# Altium PCB PCB1.PcbDoc (part 1 of 2)
Units mm, origin at the board's own origin, x right, y up, seen from the top; angles counter-clockwise.
Board outline 22.86 x 46 mm, 4 copper layers (Top Layer (sig), Plane (gnd), Plane2 (gnd), Bottom Layer (sig)), stack 1.566 mm thick; 61 components, 57 nets, 283 pads, 148 vias.
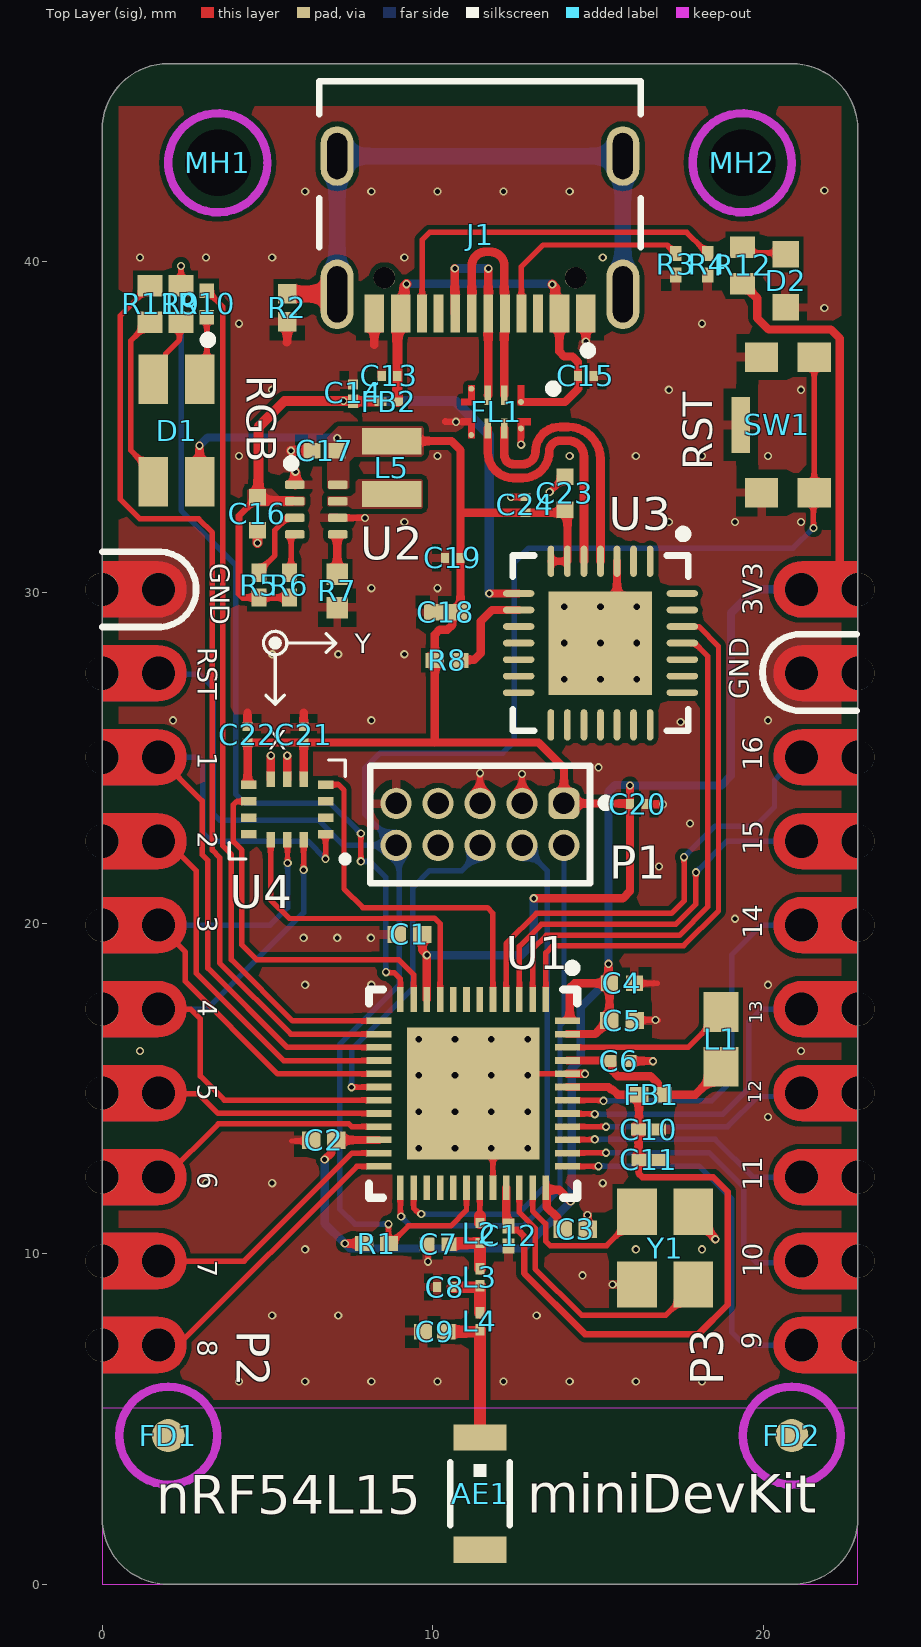
[diagram p0: Top Layer (sig) view]
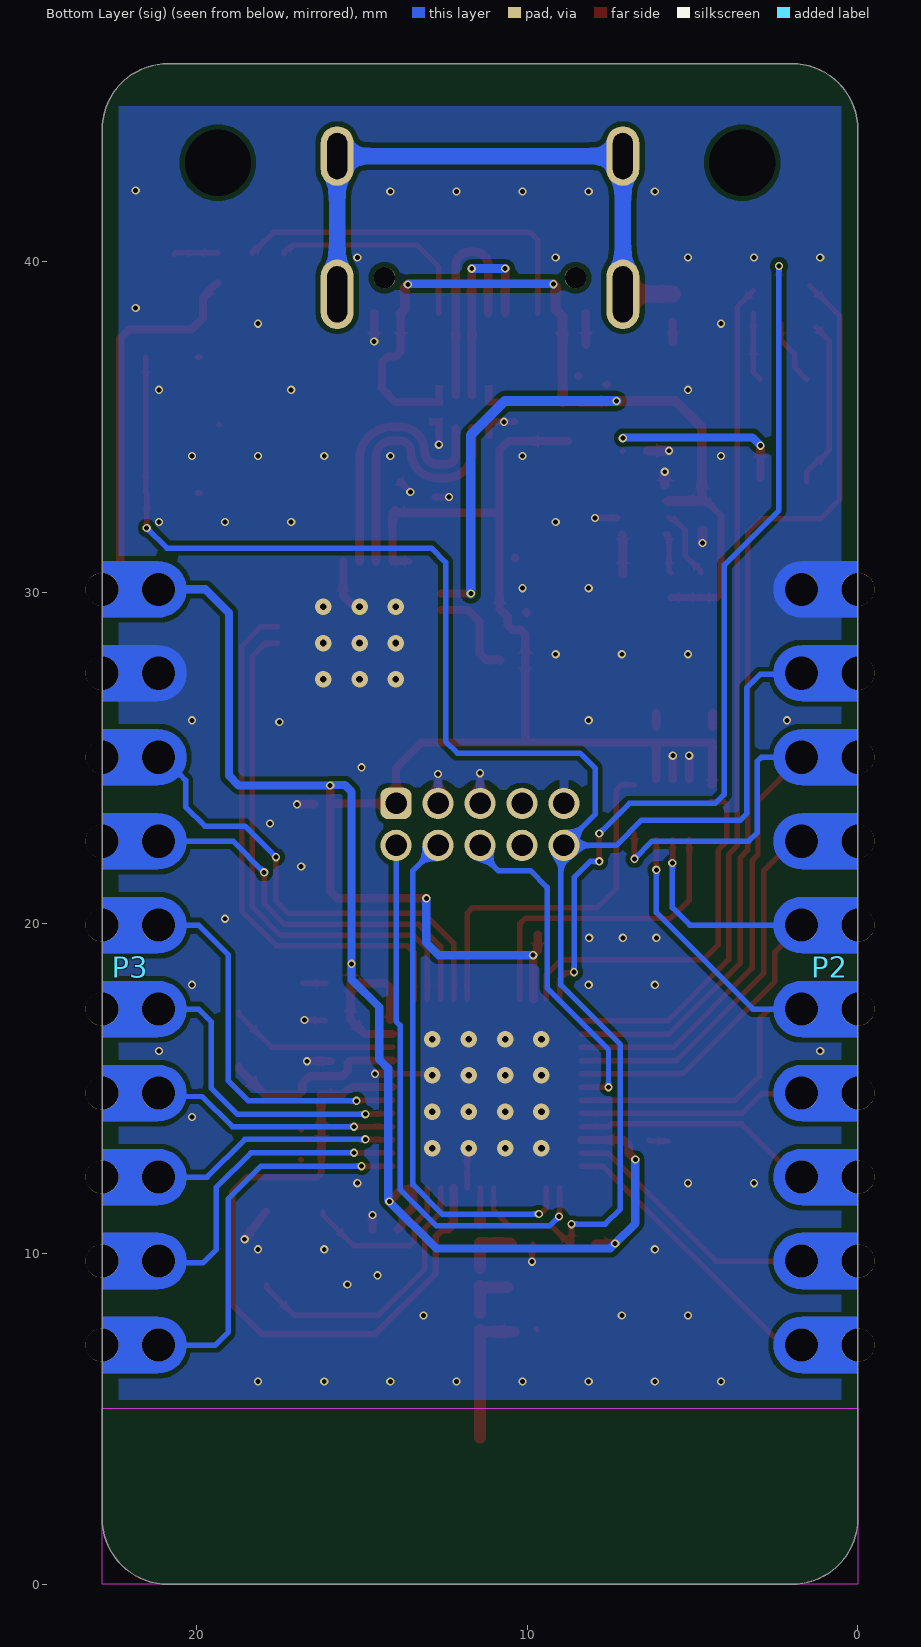
[diagram p1: Bottom Layer (sig) view, seen from below]
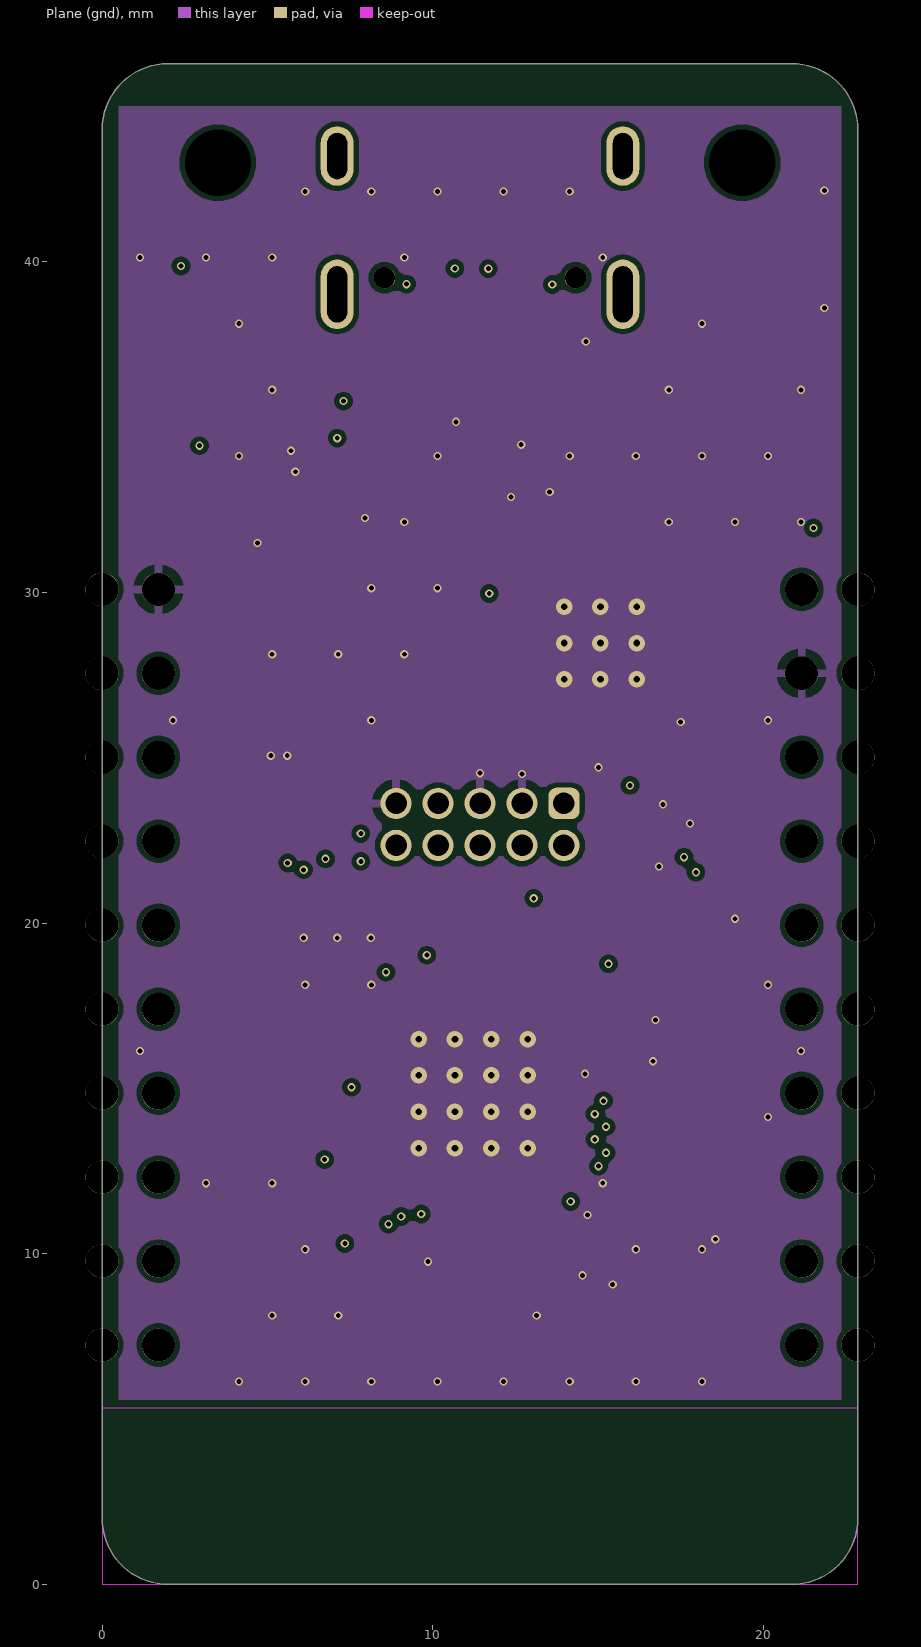
[diagram p2: Plane (gnd)]
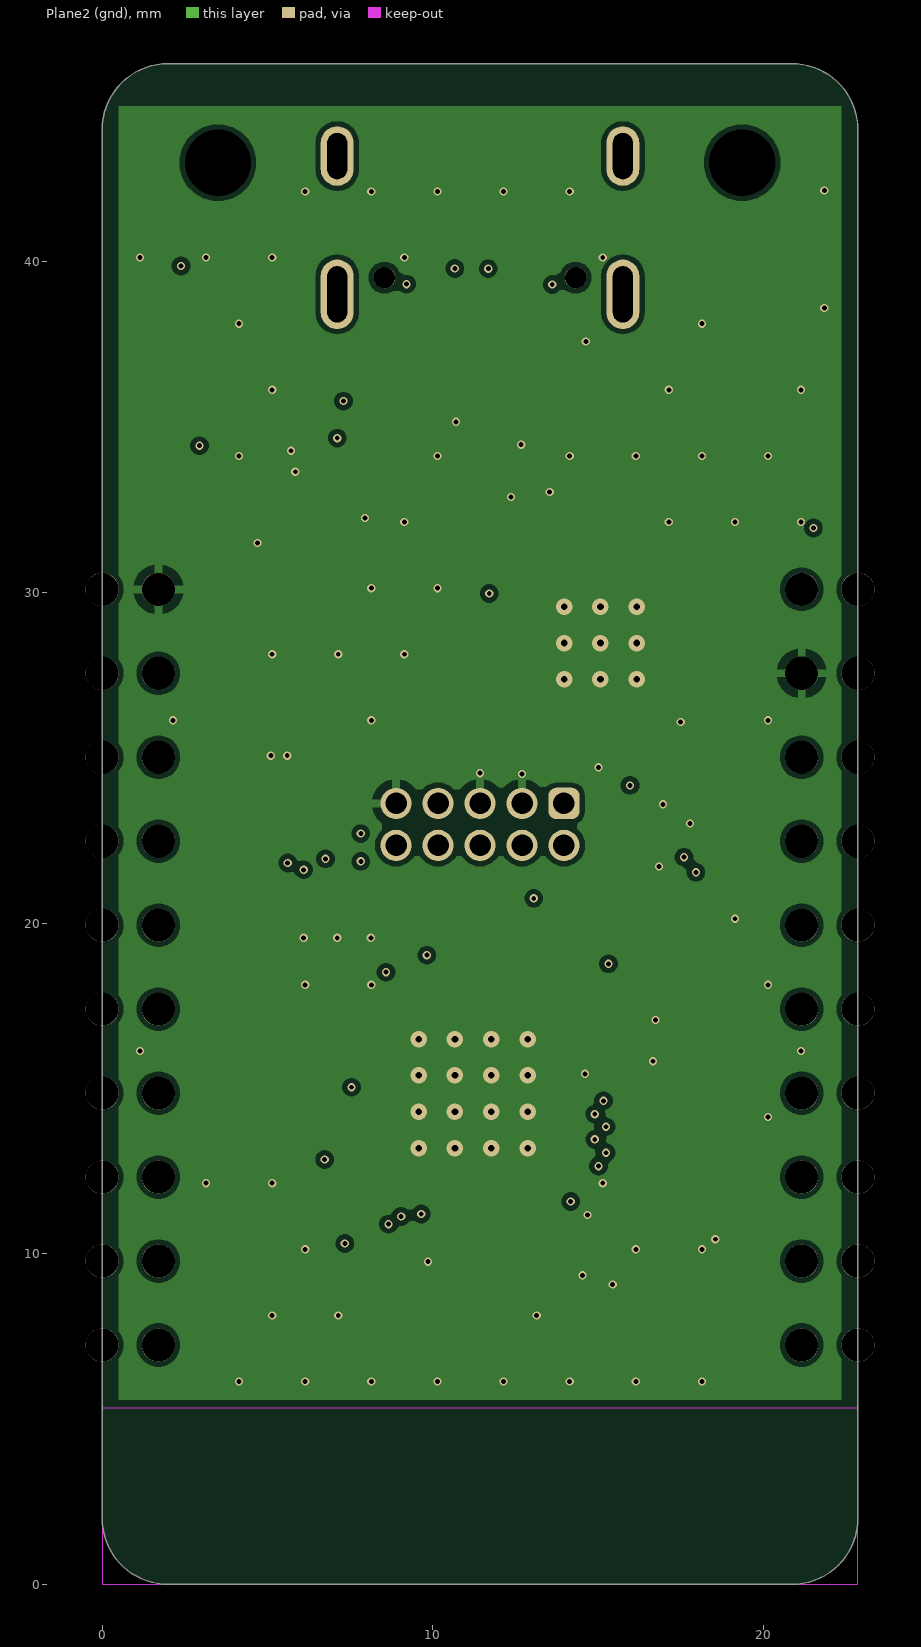
[diagram p3: Plane2 (gnd)]
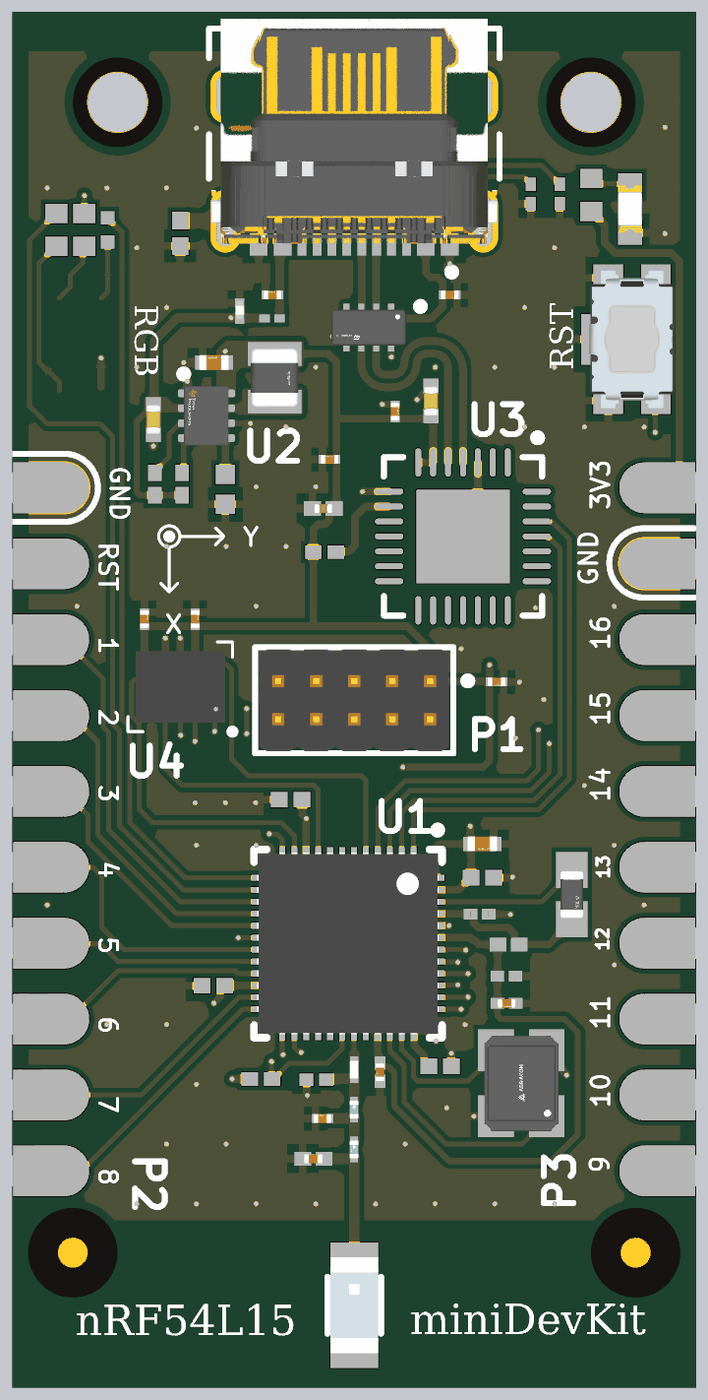
[diagram p5: 3D render of the assembled board from above, using the file's embedded part models]

## Layer stack, top to bottom
Top Solder: solder mask 0.0102, Solder Resist, Dk 3.5
Top Layer (sig): signal copper 0.035
Dielectric 2: prepreg 0.203, PP-006, Dk 4.4
Plane (gnd): signal copper 0.03
Dielectric 1: dielectric 1.03, FR-4, Dk 4.6
Plane2 (gnd): signal copper 0.03
Dielectric 3: prepreg 0.203, PP-006, Dk 4.4
Bottom Layer (sig): signal copper 0.035
Bottom Solder: solder mask 0.0102, Solder Resist, Dk 3.5

## Board outline
0,2 ccw(c2,2) 2,0 20.86,0 ccw(c20.86,2) 22.86,2 22.86,44 ccw(c20.86,44) 20.86,46 2,46 ccw(c2,44) 0,44

## Design rules (kind name [scope] priority, off if disabled: settings)
Clearance Clearance_2 [InComponent('P2','P3') vs InPolygon] p1: gap=0.152 ignorepadtopadclearanceinfootprint=TRUE
Clearance [All] p2: gap=0.15 ignorepadtopadclearanceinfootprint=FALSE
ComponentClearance [Not HasFootprint('Male_Headers_254_1x10') vs Not HasFootprint('Male_Headers_254_1x10')] p1: gap=0.254 collisioncheckmode=3 verticalgap=0.254 showdistances=FALSE
DiffPairsRouting [InDifferentialPairClass('All Differential Pairs')] p1: maxlimit=0.152 minlimit=0.152 mostfreqgap=0.152 toplayer_minwidth=0.265 toplayer_maxwidth=0.265 toplayer_prefwidth=0.265 bottomlayer_minwidth=0.265 bottomlayer_maxwidth=0.265 bottomlayer_prefwidth=0.265 impedanceprofiledriven=TRUE impedanceprofileid={C3FE540A-6831-4386-8260-1E42DD11D62C} impedanceprofilevalue=90.000000 maxuncoupledlength=12.7
HoleSize [All] p1: absolutevalues=TRUE maxlimit=6.3 minlimit=0.15 maxpercent=80.000 minpercent=20.000
HoleToHoleClearance [All] p1: gap=0.15 allowstackedmicrovias=TRUE
MinimumSolderMaskSliver [All] p1: minsoldermaskwidth=0.1
PlaneClearance [All] p1: clearance=0.254
PlaneConnect [All] p1: planeconnectstyle=Direct reliefexpansion=0.508 reliefentries=4 reliefconductorwidth=0.254 reliefairgap=0.254
PolygonConnect PolygonConnect_1 [InPadClass('Polygon_RC')] p1: thpad.connectstyle=Relief thpad.reliefconductorwidth=0.254 thpad.reliefentries=4 thpad.polygonreliefangle="90 Angle" thpad.airgapwidth=0.254 smdpad.connectstyle=Relief smdpad.reliefconductorwidth=0.254 smdpad.reliefentries=4 smdpad.polygonreliefangle="90 Angle" smdpad.airgapwidth=0.254 via.connectstyle=Direct via.reliefconductorwidth=0.254 via.reliefentries=4 via.polygonreliefangle="90 Angle" via.airgapwidth=0.254
PolygonConnect PolygonConnect_2 [(IsPad) AND (InPadClass('Polygon_DC'))] p2: thpad.connectstyle=Relief thpad.reliefconductorwidth=0.254 thpad.reliefentries=4 thpad.polygonreliefangle="90 Angle" thpad.airgapwidth=0.254 smdpad.connectstyle=Direct smdpad.reliefconductorwidth=0.254 smdpad.reliefentries=4 smdpad.polygonreliefangle="90 Angle" smdpad.airgapwidth=0.254 via.connectstyle=Direct via.reliefconductorwidth=0.254 via.reliefentries=4 via.polygonreliefangle="90 Angle" via.airgapwidth=0.254
PolygonConnect [All] p3: thpad.connectstyle=Relief thpad.reliefconductorwidth=0.254 thpad.reliefentries=4 thpad.polygonreliefangle="90 Angle" thpad.airgapwidth=0.254 smdpad.connectstyle=Relief smdpad.reliefconductorwidth=0.254 smdpad.reliefentries=4 smdpad.polygonreliefangle="90 Angle" smdpad.airgapwidth=0.254 via.connectstyle=Direct via.reliefconductorwidth=0.254 via.reliefentries=4 via.polygonreliefangle="90 Angle" via.airgapwidth=0.254
RoutingVias [All] p1: holewidth=0.2 width=0.3 viastyle="Through Hole" minholewidth=0.15 minwidth=0.25 maxholewidth=1 maxwidth=1.5
ShortCircuit [Not InComponent('P2','P3') vs Not InComponent('P2','P3')] p1: allowed=FALSE
SilkToSolderMaskClearance [IsPad] p1: minsilkscreentomaskgap=0.15 clearancetoexposedcopper=TRUE
SolderMaskExpansion [All] p1: expansion=0.038 istentingtop=FALSE
SupplyNets "Schematic Supply Nets_3" [InNet('VBUS')] p1: voltage=0.000
SupplyNets "Schematic Supply Nets_2" [InNet('V_USB')] p2: voltage=0.000
SupplyNets "Schematic Supply Nets_1" [InNet('GND')] p3: voltage=0.000
SupplyNets "Schematic Supply Nets" [InNet('3V3')] p4: voltage=0.000
Width RF_BLE [InNetClass('AntennaClass')] p1: maxlimit=0.355 minlimit=0.116 preferedwidth=0.355 toplayer_minwidth=0.355 bottomlayer_minwidth=0.355 impedanceprofiledriven=TRUE impedanceprofileid={DB60802E-1F74-4AC1-8945-EA78357C024C} impedanceprofilevalue=50.000000 minimp=50.000000 maximp=50.000000 favimp=50.000000
Width [All] p2: maxlimit=1 minlimit=0.165 preferedwidth=0.165
21 further rules are at their usual default settings.

## Classes and differential pairs
pad class Polygon_RC: P2- P2-1 P2-2 P2-3 P2-4 P2-5 P2-6 P2-7 P2-8 P2-9 P2-10 P3- P3-1 P3-2 P3-3 P3-4 P3-5 P3-6 P3-7 P3-8 P3-9 P3-10
pad class Polygon_DC: C16-1 C17-1 L5-1 L5-2 U2-2 U2-7 U2-8
polygon class "New Class": 3V3_L01_P007 NETL5_1_L01_P006 V_USB_L01_P008
component class Top-level: FD1 FD2 MH1 MH2
component class U_USB_UART_Bridge: C18 C19 C23 C24 R8 U3
component class U_Power: C16 C17 D2 L5 R5 R6 R7 R12 U2
component class U_MCU: AE1 C1 C2 C3 C4 C5 C6 C7 C8 C9 C10 C11 C12 D1 FB1 L1 L2 L3 L4 R1 R9 R10 R11 SW1 U1 Y1
component class U_IMU: C21 C22 U4
component class U_Connector: C13 C14 C15 C20 FB2 FL1 J1 P1 P2 P3 R2 R3 R4
differential pair USBD: +USBD_P -USBD_N
differential pair USB_D: +USB_D_P -USB_D_N

## Components (designator, comment, footprint, x,y, rotation, side; value= is the part's Value field where it differs from the comment)
AE1 "74889302450" 74889302450 11.43,2.743 r270 top locked
C1 "0.1uF" CAPC0603X33X15ML03T05 9.296,19.66 r0 top
C2 "0.1uF" CAPC0603X33X15ML03T05 6.707,13.437 r0 top
C3 "0.1uF" CAPC0603X33X15ML03T05 14.308,10.741 r180 top
C4 "10uF" FP-CL07-IPC_C 15.722,18.182 r0 top
C5 "0.1uF" CAPC0603X33X15ML03T05 15.726,17.053 r180 top
C6 "2.2uF" FP-CL03-IPC_B 15.632,15.828 r0 top
C7 "1.5pF" CAPC0603X33X15NL03T05 10.16,10.287 r0 top
C8 "2.0pF" FP-GRM033-0_03-MFG 10.363,8.992 r180 top
C9 "0.3pF" FP-GJM033-0_03-IPC_A 10.058,7.645 r180 top
C10 "2.2uF" FP-CL03-IPC_B 16.527,13.758 r0 top
C11 "10nF" FP-GRM033-0_03-IPC_B 16.537,12.841 r0 top
C12 "10nF" FP-GRM033-0_03-IPC_B 12.294,10.541 r270 top
C13 "0.10uF" FP-GRM033-0_03-MFG 8.692,36.553 r180 top
C14 "1uF" FP-CL03-IPC_C 7.594,36.042 r90 top
C15 "0.10uF" FP-GRM033-0_03-MFG 14.631,36.553 r0 top
C16 "4.7uF" FP-CC0402-MFG 4.699,32.385 r270 top value="4.7 uF"
C17 "10uF" FP-CL07-IPC_C 6.731,34.29 r180 top
C18 "1uF" FP-GRM033-0_09-IPC_A 10.393,29.406 r180 top
C19 "0.1uF" FP-GRM033-0_03-MFG 10.605,31.051 r180 top
C20 "0.10uF" FP-GRM033-0_03-MFG 16.201,23.602 r0 top
C21 "0.1uF" FP-GRM033-0_03-MFG 6.099,25.705 r90 top locked
C22 "0.1uF" FP-GRM033-0_03-MFG 4.402,25.705 r90 top locked
C23 "4.7UF" FP-CC0402-MFG 14,33 r90 top value="4.7 uF"
C24 "0.10uF" FP-GRM033-0_03-MFG 12.8,32.65 r90 top
D1 "150141M173100" WL-SFTW_3528_150141M173100 1272.249,-1235.1 r270 top
D2 "150060GS75000" WL-SMCW_0603_150060xx75000 20.673,39.431 r90 top
FB1 "BLM03AG121SN1D" FP-BLM03-0_03-d0_3-IPC_A 16.605,14.811 r180 top
FB2 "" FP-BLM03-0_03-d0_3-IPC_C 8.674,35.769 r180 top
FD1 "Fiducial 1mm" Fiducial_1mm 2,4.5 r0 top
FD2 "Fiducial 1mm" Fiducial_1mm 20.86,4.5 r0 top
FL1 "ECMF02-4CMX8" FP-Micro_QFN-8L-MFG 11.917,35.466 r270 top
J1 "USB4105-GF-A" FP-USB4105-GF-A-MFG 11.43,42.037 r180 top locked
L1 "4.7uH" FP-MLZ1608-IPC_A 18.72,16.485 r270 top
L2 "2.7nH" FP-LQP03HQ_02-MFG 11.428,10.625 r270 top
L3 "3.5nH" FP-LQP03TG_02-IPC_C 11.428,9.29 r270 top
L4 "3.5nH" FP-LQP03TG_02-IPC_C 11.428,7.958 r270 top
L5 "2.2uH" FP-DFE201612C-MFG 8.763,33.782 r90 top
MH1 "Mounting Hole M2" "Mounting Hole M2" 3.5,43 r0 top
MH2 "Mounting Hole M2" "Mounting Hole M2" 19.36,43 r0 top
P1 "62201021121" 62201021121 11.43,22.987 r180 top locked
P2 "1X10 2.54 male headers" Male_Headers_254_1x10 0.85,18.669 r90 bottom
P3 "1X10 2.54 male headers" Male_Headers_254_1x10 22.01,18.669 r270 bottom
R1 "1K" RESC0603X28X15ML05T05 8.305,10.311 r180 top
R2 "0" RESC1005X40X25NL05T10 5.598,38.616 r90 top
R3 "5.1K" RESC0603X26X15NL03T05 17.348,39.929 r90 top
R4 "5.1K" RESC0603X26X15NL03T05 18.315,39.934 r90 top
R5 "1K" RESC0603X28X15ML05T05 4.75,30.226 r90 top
R6 "1K" RESC0603X28X15ML05T05 5.664,30.226 r90 top
R7 "267K" RESC1005X40X25ML05T05 7.112,30.048 r90 top
R8 "1K" RESC0603X28X15ML05T05 10.438,27.95 r0 top
R9 "4R7" RESC0402(1005)_M 2.382,38.729 r90 top value="4.70 Ohm"
R10 "62R" RESC1005X40X25LL05T05 3.166,38.729 r90 top
R11 "4R7" RESC0402(1005)_M 1.45,38.729 r90 top value="4.70 Ohm"
R12 "4R7" RESC0402(1005)_M 19.369,39.898 r90 top value="4.70 Ohm"
SW1 "435431019840" 435431019840 20.739,35.07 r90 top
U1 "nRF54L15" nRF54L15_QFN8_6X6 11.222,14.845 r270 top locked
U2 "TPS62840DLCR" FP-DLC0008B-MFG 6.477,32.512 r0 top
U3 "CP2102-GMR" SLAB-QFN-28-3125x3125TP_M 15.074,28.473 r270 top
U4 "BMI323" BMI323 5.599,23.438 r180 top locked
Y1 "32MHz" FP-ABM8G-MFG 17.03,10.168 r90 top

## Footprints (in the part's own frame and the unit in brackets; to place one, negate y for a bottom-side part, rotate by r counter-clockwise, add the part's x,y. Pads: shape width x height; smd on the part's side, far side on the other; paste and mask are expansions set on the pad)
62201021121 [mm] "Pin Header, pitch 1.27 mm, THT, Vertical, dual row, 10p"
  rrect50% 0.95x0.95 hole 0.65: 1(-2.54,-0.635)
  round 0.95 hole 0.65: 2(-2.54,0.635) 3(-1.27,-0.635) 4(-1.27,0.635) 5(0,-0.635) 6(0,0.635) 7(1.27,-0.635) 8(1.27,0.635) 9(2.54,-0.635) 10(2.54,0.635)
  silkscreen extent -3.93,-1.78 3.32,1.78, body extent -3.17,-1.7 3.18,1.7, height 5.33
74889302450 [mm] "SMT-Multilayer Chip Antenna, body 3.2x1.6mm"
  rect 0.8x1.6 smd: 1(-1.7,0) 2(1.7,0)
  silkscreen extent -0.95,-0.9 0.95,0.9, body extent -1.6,-0.8 1.6,0.8, height 1.2
435431019840 [mm] "Tact Switch, SMT, body 4.1x2.8mm"
  rect 0.9x1 smd: A1(-2.05,0.8) A2(2.05,0.8) B1(-2.05,-0.8) B2(2.05,-0.8)
  rect 1.7x0.55 smd: G1(0,1.425)
  body extent -2.3,-1.4 2.3,1.45, height 1.9
BMI323 [mm]
  rect 0.475x0.25 smd: 1(-1.162,0.75) 2(-1.162,0.25) 3(-1.162,-0.25) 4(-1.162,-0.75) 8(1.162,-0.75) 9(1.162,-0.25) 10(1.162,0.25) 11(1.162,0.75)
  rect 0.25x0.475 smd: 5(-0.5,-0.913) 6(0,-0.913) 7(0.5,-0.913) 12(0.5,0.913) 13(0,0.913) 14(-0.5,0.913)
  silkscreen extent -1.85,-1.5 1.75,1.6, body extent -1.5,-1.19 1.5,1.19, height 0.87
CAPC0603X33X15ML03T05 [mm] "Chip Capacitor, 2-Leads, Body 0.60x0.30mm, IPC Low Density"
  rect 0.56x0.52 smd: 1(-0.38,0) 2(0.38,0)
  body extent -0.31,-0.17 0.32,0.16, height 0.33
CAPC0603X33X15NL03T05 [mm] "Chip Capacitor, 2-Leads, Body 0.60x0.30mm, IPC Medium Density"
  rect 0.46x0.42 smd: 1(-0.33,0) 2(0.33,0)
  body extent -0.31,-0.17 0.32,0.16, height 0.33
Fiducial_1mm [mm]
  round 1 smd paste-3 mask+1: 1(0,0)
  Top Layer (sig) keep-out circle w0.254: c0,0 r1.481
FP-ABM8G-MFG [mm]
  rect 1.4x1.2 smd paste+0 mask+0: 1(-1.1,-0.85) 2(1.1,-0.85) 3(1.1,0.85) 4(-1.1,0.85)
  body extent -1.9,-1.55 1.9,1.55, height 0.25
FP-BLM03-0_03-d0_3-IPC_A [mm]
  rect 0.554x0.463 smd paste+0 mask+0: 1(-0.354,0) 2(0.354,0)
FP-BLM03-0_03-d0_3-IPC_C [mm]
  rect 0.354x0.263 smd paste+0 mask+0: 1(-0.254,0) 2(0.254,0)
FP-CC0402-MFG [mm]
  rect 0.5x0.5 smd paste+0 mask+0: 1(-0.5,0) 2(0.5,0)
  body extent -0.87,-0.48 0.87,0.48, height 0.25
FP-CL03-IPC_B [mm]
  rect 0.454x0.363 smd paste+0 mask+0: 1(-0.304,0) 2(0.304,0)
  body extent -0.68,-0.33 0.68,0.33, height 0.25
FP-CL03-IPC_C [mm]
  rect 0.402x0.303 smd paste+0 mask+0: 1(-0.251,0)
  rect 0.3x0.303 smd paste+0 mask+0: 2(0.251,0)
  body extent -0.55,-0.3 0.55,0.3, height 0.25
FP-CL07-IPC_C [mm]
  rect 0.515x0.472 smd paste+0 mask+0: 1(-0.379,0) 2(0.379,0)
  body extent -0.74,-0.38 0.74,0.38, height 0.25
FP-DFE201612C-MFG [mm]
  rect 0.8x1.8 smd paste+0 mask+0: 1(-0.8,0) 2(0.8,0)
  body extent -1.3,-1 1.3,1, height 0.25
FP-DLC0008B-MFG [mm]
  rrect40% 0.6x0.25 smd paste+0 mask+0: 1(-0.65,0.75) 2(-0.65,0.25) 3(-0.65,-0.25) 4(-0.65,-0.75) 5(0.65,-0.75) 6(0.65,-0.25) 7(0.65,0.25) 8(0.65,0.75)
  silkscreen extent -0.89,1.27 -0.64,1.52, body extent -1.05,-1.15 1.05,1.15, height 0.25
FP-GJM033-0_03-IPC_A [mm]
  rect 0.554x0.463 smd paste+0 mask+0: 1(-0.354,0) 2(0.354,0)
  body extent -0.83,-0.43 0.83,0.43, height 0.25
FP-GRM033-0_03-IPC_B [mm]
  rect 0.454x0.363 smd paste+0 mask+0: 1(-0.304,0) 2(0.304,0)
  body extent -0.68,-0.33 0.68,0.33, height 0.25
FP-GRM033-0_03-MFG [mm]
  rect 0.25x0.3 smd paste+0 mask+0: 1(-0.238,0) 2(0.238,0)
  body extent -0.46,-0.27 0.46,0.27, height 0.25
FP-GRM033-0_09-IPC_A [mm]
  rect 0.577x0.503 smd paste+0 mask+0: 1(-0.363,0) 2(0.363,0)
  body extent -0.85,-0.45 0.85,0.45, height 0.25
FP-LQP03HQ_02-MFG [mm]
  rect 0.3x0.275 smd paste+0 mask+0: 1(-0.3,0) 2(0.3,0)
  body extent -0.55,-0.27 0.55,0.26, height 0.25
FP-LQP03TG_02-IPC_C [mm]
  rect 0.354x0.263 smd paste+0 mask+0: 1(-0.254,0) 2(0.254,0)
  body extent -0.53,-0.27 0.53,0.26, height 0.25
FP-Micro_QFN-8L-MFG [mm]
  round 0.18 smd paste+0 mask+0: 1(-0.3,0.75) 4(-0.7,-0.75) 5(0.7,-0.75) 8(0.5,0.75)
  rect 0.6x0.2 smd paste+0 mask+0: 2(-0.5,0.25) 3(-0.5,-0.25) 6(0.5,-0.25) 7(0.5,0.25)
  Top Layer (sig) region: 0.2,-1.05 0.4,-1.05 0.4,-0.85 0.8,-0.85 0.8,-0.65 0.2,-0.65
  Top Layer (sig) region: 0.2,1.05 0.4,1.05 0.4,0.85 0.8,0.85 0.8,0.65 0.2,0.65
  Top Layer (sig) region: -0.2,-1.05 -0.4,-1.05 -0.4,-0.85 -0.8,-0.85 -0.8,-0.65 -0.2,-0.65
  Top Layer (sig) region: -0.2,1.05 -0.4,1.05 -0.4,0.85 -0.8,0.85 -0.8,0.65 -0.2,0.65
  silkscreen extent -0.83,1.6 -0.58,1.85, body extent -0.9,-1.38 0.9,1.38, height 0.25
FP-MLZ1608-IPC_A [mm]
  rect 1.206x1.058 smd paste+0 mask+0: 1(-0.826,0) 2(0.826,0)
  body extent -1.93,-1.03 1.93,1.03, height 0.25
FP-USB4105-GF-A-MFG [mm]
  rrect100% 1x2.1 hole 1.7 slot 0.6 at 0 deg paste-2539.97 mask+0: 1(-4.32,3.015) 2(4.32,3.015)
  rrect100% 1x1.8 hole 1.4 slot 0.6 at 0 deg paste-2539.97 mask+0: 3(-4.32,-1.165) 4(4.32,-1.165)
  rect 0.6x1.15 smd paste+0 mask+0: A1-B12(-3.2,3.59) A4-B9(-2.4,3.59) B1-A12(3.2,3.59) B4-A9(2.4,3.59)
  rect 0.3x1.15 smd paste+0 mask+0: A5(-1.25,3.59) A6(-0.25,3.59) A7(0.25,3.59) A8(1.25,3.59) B5(1.75,3.59) B6(0.75,3.59) B7(-0.75,3.59) B8(-1.75,3.59)
  round 0.65 hole 0.65 unplated paste-2539.97 mask+0: ""(-2.89,2.515) ""(2.89,2.515)
  silkscreen extent -4.86,-3.43 4.86,4.84, body extent -4.96,-3.94 4.96,4.27, height 0.25
Male_Headers_254_1x10 [mm]
  round 1 hole 1: 1(-11.43,0.85) 2(-8.89,0.85) 3(-6.35,0.85) 4(-3.81,0.85) 5(-1.27,0.85) 6(1.27,0.85) 7(3.81,0.85) 8(6.35,0.85) 9(8.89,0.85) 10(11.43,0.85) ""(-11.43,-0.85) ""(-8.89,-0.85) ""(-6.35,-0.85) ""(-3.81,-0.85) ""(-1.27,-0.85) ""(1.27,-0.85) ""(3.81,-0.85) ""(6.35,-0.85) ""(8.89,-0.85) ""(11.43,-0.85)
  Top Layer (sig) region: -12.28,-0.85 -10.58,-0.85 -10.58,0.85 -10.664,1.219 -10.9,1.515 -11.241,1.679 -11.619,1.679 -11.96,1.515 -12.196,1.219 -12.28,0.85 -12.28,0.85
  Top Layer (sig) region: -9.74,-0.85 -8.04,-0.85 -8.04,0.85 -8.124,1.219 -8.36,1.515 -8.701,1.679 -9.079,1.679 -9.42,1.515 -9.656,1.219 -9.74,0.85 -9.74,0.85
  Top Layer (sig) region: -7.2,-0.85 -5.5,-0.85 -5.5,0.85 -5.584,1.219 -5.82,1.515 -6.161,1.679 -6.539,1.679 -6.88,1.515 -7.116,1.219 -7.2,0.85 -7.2,0.85
  Top Layer (sig) region: -4.66,-0.85 -2.96,-0.85 -2.96,0.85 -3.044,1.219 -3.28,1.515 -3.621,1.679 -3.999,1.679 -4.34,1.515 -4.576,1.219 -4.66,0.85 -4.66,0.85
  Top Layer (sig) region: -2.12,-0.85 -0.42,-0.85 -0.42,0.85 -0.504,1.219 -0.74,1.515 -1.081,1.679 -1.459,1.679 -1.8,1.515 -2.036,1.219 -2.12,0.85 -2.12,0.85
  Top Layer (sig) region: 0.42,-0.85 2.12,-0.85 2.12,0.85 2.036,1.219 1.8,1.515 1.459,1.679 1.081,1.679 0.74,1.515 0.504,1.219 0.42,0.85 0.42,0.85
  Top Layer (sig) region: 2.96,-0.85 4.66,-0.85 4.66,0.85 4.576,1.219 4.34,1.515 3.999,1.679 3.621,1.679 3.28,1.515 3.044,1.219 2.96,0.85 2.96,0.85
  Top Layer (sig) region: 5.5,-0.85 7.2,-0.85 7.2,0.85 7.116,1.219 6.88,1.515 6.539,1.679 6.161,1.679 5.82,1.515 5.584,1.219 5.5,0.85 5.5,0.85
  Top Layer (sig) region: 8.04,-0.85 9.74,-0.85 9.74,0.85 9.656,1.219 9.42,1.515 9.079,1.679 8.701,1.679 8.36,1.515 8.124,1.219 8.04,0.85 8.04,0.85
  Top Layer (sig) region: 10.58,-0.85 12.28,-0.85 12.28,0.85 12.196,1.219 11.96,1.515 11.619,1.679 11.241,1.679 10.9,1.515 10.664,1.219 10.58,0.85 10.58,0.85
  Bottom Layer (sig) region: 0.42,-0.85 2.12,-0.85 2.12,0.85 2.036,1.219 1.8,1.515 1.459,1.679 1.081,1.679 0.74,1.515 0.504,1.219 0.42,0.85 0.42,0.85
  Bottom Layer (sig) region: 10.58,-0.85 12.28,-0.85 12.28,0.85 12.196,1.219 11.96,1.515 11.619,1.679 11.241,1.679 10.9,1.515 10.664,1.219 10.58,0.85 10.58,0.85
  Bottom Layer (sig) region: 8.04,-0.85 9.74,-0.85 9.74,0.85 9.656,1.219 9.42,1.515 9.079,1.679 8.701,1.679 8.36,1.515 8.124,1.219 8.04,0.85 8.04,0.85
  Bottom Layer (sig) region: 5.5,-0.85 7.2,-0.85 7.2,0.85 7.116,1.219 6.88,1.515 6.539,1.679 6.161,1.679 5.82,1.515 5.584,1.219 5.5,0.85 5.5,0.85
  Bottom Layer (sig) region: 2.96,-0.85 4.66,-0.85 4.66,0.85 4.576,1.219 4.34,1.515 3.999,1.679 3.621,1.679 3.28,1.515 3.044,1.219 2.96,0.85 2.96,0.85
  Bottom Layer (sig) region: -4.66,-0.85 -2.96,-0.85 -2.96,0.85 -3.044,1.219 -3.28,1.515 -3.621,1.679 -3.999,1.679 -4.34,1.515 -4.576,1.219 -4.66,0.85 -4.66,0.85
  Bottom Layer (sig) region: -2.12,-0.85 -0.42,-0.85 -0.42,0.85 -0.504,1.219 -0.74,1.515 -1.081,1.679 -1.459,1.679 -1.8,1.515 -2.036,1.219 -2.12,0.85 -2.12,0.85
  Bottom Layer (sig) region: -7.2,-0.85 -5.5,-0.85 -5.5,0.85 -5.584,1.219 -5.82,1.515 -6.161,1.679 -6.539,1.679 -6.88,1.515 -7.116,1.219 -7.2,0.85 -7.2,0.85
  Bottom Layer (sig) region: -9.74,-0.85 -8.04,-0.85 -8.04,0.85 -8.124,1.219 -8.36,1.515 -8.701,1.679 -9.079,1.679 -9.42,1.515 -9.656,1.219 -9.74,0.85 -9.74,0.85
  Bottom Layer (sig) region: -12.28,-0.85 -10.58,-0.85 -10.58,0.85 -10.664,1.219 -10.9,1.515 -11.241,1.679 -11.619,1.679 -11.96,1.515 -12.196,1.219 -12.28,0.85 -12.28,0.85
"Mounting Hole M2" [mm]
  round 0 hole 2 mask+1.5: 3(0,0)
  Top Layer (sig) keep-out circle w0.254: c0,0 r1.5
nRF54L15_QFN8_6X6 [mm] "nRF54L15_QFN8_6X6, 48-Leads, Body 6,00x6,00mm, Pitch 0,40mm, Thermal Pad 4,60x4,60mm, IPC High Density"
  rect 0.75x0.2 smd: 1(-2.85,2.2) 2(-2.85,1.8) 3(-2.85,1.4) 4(-2.85,1) 5(-2.85,0.6) 6(-2.85,0.2) 7(-2.85,-0.2) 8(-2.85,-0.6) 9(-2.85,-1) 10(-2.85,-1.4) 11(-2.85,-1.8) 12(-2.85,-2.2) 25(2.85,-2.2) 26(2.85,-1.8) 27(2.85,-1.4) 28(2.85,-1) 29(2.85,-0.6) 30(2.85,-0.2) 31(2.85,0.2) 32(2.85,0.6) 33(2.85,1) 34(2.85,1.4) 35(2.85,1.8) 36(2.85,2.2)
  rect 0.2x0.75 smd: 13(-2.2,-2.85) 14(-1.8,-2.85) 15(-1.4,-2.85) 16(-1,-2.85) 17(-0.6,-2.85) 18(-0.2,-2.85) 19(0.2,-2.85) 20(0.6,-2.85) 21(1,-2.85) 22(1.4,-2.85) 23(1.8,-2.85) 24(2.2,-2.85) 37(2.2,2.85) 38(1.8,2.85) 39(1.4,2.85) 40(1,2.85) 41(0.6,2.85) 42(0.2,2.85) 43(-0.2,2.85) 44(-0.6,2.85) 45(-1,2.85) 46(-1.4,2.85) 47(-1.8,2.85) 48(-2.2,2.85)
  rect 4x4 smd: 49(0,0)
  silkscreen extent -3.92,-3.15 3.15,3.15, body extent -3.04,-3.04 3.04,3.04, height 0.9
RESC0402(1005)_M [mm] "Chip Resistor, Body 1.0x0.5mm, IPC Low Density"
  rect 0.65x0.75 smd: 1(-0.55,0) 2(0.55,0)
  body extent -0.52,-0.28 0.53,0.28, height 0.4
RESC0603X26X15NL03T05 [mm] "Chip Resistor, 2-Leads, Body 0.60x0.30mm, IPC Medium Density"
  rect 0.45x0.35 smd: 1(-0.325,0) 2(0.325,0)
  body extent -0.32,-0.16 0.32,0.17, height 0.26
RESC0603X28X15ML05T05 [mm] "Chip Resistor, 2-Leads, Body 0.60x0.30mm, IPC Low Density"
  rect 0.55x0.45 smd: 1(-0.375,0) 2(0.375,0)
  body extent -0.33,-0.17 0.33,0.18, height 0.28
RESC1005X40X25LL05T05 [mm] "Chip Resistor, 2-Leads, Body 1.00x0.50mm, IPC High Density"
  rect 0.45x0.45 smd: 1(-0.4,0) 2(0.4,0)
  body extent -0.53,-0.27 0.53,0.28, height 0.4
RESC1005X40X25ML05T05 [mm] "Chip Resistor, 2-Leads, Body 1.00x0.50mm, IPC Low Density"
  rect 0.65x0.65 smd: 1(-0.5,0) 2(0.5,0)
  body extent -0.53,-0.27 0.53,0.28, height 0.4
RESC1005X40X25NL05T10 [mm] "Chip Resistor, 2-Leads, Body 1.00x0.50mm, IPC Medium Density"
  rect 0.6x0.55 smd: 1(-0.425,0) 2(0.425,0)
  body extent -0.53,-0.27 0.53,0.28, height 0.4
SLAB-QFN-28-3125x3125TP_M [mm] "QFN, 28-Leads, Body 5x5mm, Pitch 0.5mm, Thermal Pad 3.13x3.13mm, IPC Low Density"
  oval 0.95x0.2 smd: 1(-2.475,1.5) 2(-2.475,1) 3(-2.475,0.5) 4(-2.475,0) 5(-2.475,-0.5) 6(-2.475,-1) 7(-2.475,-1.5) 15(2.475,-1.5) 16(2.475,-1) 17(2.475,-0.5) 18(2.475,0) 19(2.475,0.5) 20(2.475,1) 21(2.475,1.5)
  oval 0.2x0.95 smd: 8(-1.5,-2.475) 9(-1,-2.475) 10(-0.5,-2.475) 11(0,-2.475) 12(0.5,-2.475) 13(1,-2.475) 14(1.5,-2.475) 22(1.5,2.475) 23(1,2.475) 24(0.5,2.475) 25(0,2.475) 26(-0.5,2.475) 27(-1,2.475) 28(-1.5,2.475)
  rect 3.13x3.13 smd: 29(0,0)
  silkscreen extent -3.42,-2.65 2.65,2.65, body extent -2.5,-2.5 2.5,2.5, height 1
WL-SFTW_3528_150141M173100 [mm] "SMT Full-color TOP LED Waterclear, body 3.5x2.8mm"
  rect 1.5x0.9 smd: 1(-1268.45,-1269.3) 2(-1268.45,-1270.7) 3(-1271.55,-1269.3) 4(-1271.55,-1270.7)
  silkscreen extent -1272.87,-1269.17 -1272.62,-1268.92, body extent -1271.75,-1271.4 -1268.25,-1268.6, height 1.9
WL-SMCW_0603_150060xx75000 [mm] "SMD Mono-color Chip LED, body 1.60 x 0.80 mm"
  rect 0.8x0.8 smd: 1(-0.8,0) 2(0.8,0)
  body extent -0.8,-0.4 0.8,0.4, height 0.7

## Part data
AE1: library part CMP-03913-126098687-1, "74889302450 Chip Antenna, 2.45Ghz, 3.2Mm X 1.6Mm X 1.2Mm Rohs Compliant: Yes", Current Rating=2A, Max Operating Temperature=85°C, Min Operating Temperature=-40°C, Height=1.2mm, Impedance=50Ω, Length=3.2mm, NexarPartId=126098687, RoHS=Compliant, Width=1.6mm
C1 C2 C3 C5: library part CMP-2010-00674-1, Manufacturer=Samsung, Part Number=CL03A104KQ3NNNC
C4 C17: library part CMP-13271-002778-1, "Cap Ceramic 10uF 10V X5R ±20% SMD 0402 +85°C Paper T/R", Case Code (Imperial)=0402, Case Code (Metric)=1005, Max Operating Temperature=85°C, Min Operating Temperature=-55°C, Tolerance=20%, Voltage Rating=10V, Capacitance=10uF, Case/Package=0402, Length=0.039inch, Mount="Surface Mount", Packaging="Tape and Reel", Thickness=0.035inch, Width=0.02inch
C6 C10: library part CMP-13271-002263-1, "Cap Ceramic 2.2uF 10V X5R ±20% Pad SMD 0201 +85°C T/R", Case Code (Imperial)=0201, Case Code (Metric)=0603, Max Operating Temperature=85°C, Min Operating Temperature=-55°C, Tolerance=20%, Voltage Rating=10V, Capacitance=2.2uF, Case/Package=0201, Lead Free="Lead Free", Length=0.024inch, Mount="Surface Mount", Packaging="Tape and Reel", Thickness=0.013inch, Width=0.012inch
C7: library part CMP-1033-00061-2, Manufacturer="AVX Interconnect / Elco", Part Number=02013A1R5CAT2A
C8: library part CMP-2010-01348-2, "Chip Multilayer Ceramic Capacitors for General Purpose, 0201, 2.0pF, C0G, 30ppm/°C, 0.25pF, 25V", Capacitance=2pF, Case Code (Imperial)=0201, Case Code (Metric)=0603, Dielectric=C0G, Max Operating Temperature=125°C, Min Operating Temperature=-55°C, Package Quantity=15000, Voltage Rating=25V, Case/Package=0201, Height=0.3mm, Lead Free="Lead Free", Length=0.024inch, Mount="Surface Mount", Packaging="Tape and Reel", REACH SVHC="No SVHC", Termination=SMD/SMT, Thickness=0.013inch, Voltage Rating (DC)=25V, Width=0.012inch
C9: library part CMP-2010-00788-2, "Ceramic Capacitor 0.3pF ±0.05pF 25V C0G 0201 (0603 Metric)", Case Code (Imperial)=0201, Case Code (Metric)=0603, Dielectric=C0G, Max Operating Temperature=125°C, Min Operating Temperature=-55°C, Package Quantity=15000, Voltage Rating=25V, Capacitance=0.3pF, Case/Package=0201, Depth=0.3mm, Height=0.3mm, Lead Free="Lead Free", Length=0.6mm, Mount="Surface Mount", Packaging="Tape and Reel", Radiation Hardening=No, Termination=SMD/SMT, Thickness=0.013inch, Voltage Rating (DC)=25V, Width=0.3mm
C11 C12: library part CMP-2010-01684-2, "Chip Multilayer Ceramic Capacitors for General Purpose, 0201, 10000pF, X7R, 15%, 10%, 10V", Case Code (Imperial)=0201, Case Code (Metric)=0603, Dielectric=X7R, Max Operating Temperature=125°C, Min Operating Temperature=-55°C, Package Quantity=1, Tolerance=10%, Voltage=10V, Capacitance=10nF, Case/Package=0201, Depth=0.3mm, Height=0.3mm, Lead Free="Lead Free", Length=0.6mm, Material=Ceramic, Mount="Surface Mount", Packaging="Tape and Reel", Radiation Hardening=No, REACH SVHC="No SVHC", Termination=SMD/SMT, Thickness=0.013inch, Voltage Rating=10V, Voltage Rating (DC)=10V, Width=0.012inch
C13 C15 C19 C20 C21 C22 C24: library part CMP-06035-019037-1, "Chip Multilayer Ceramic Capacitors for General Purpose, 0201, 0.10uF, X7S, 22%, 10%, 16V", Capacitance=100nF, Case Code (Imperial)=0201, Case Code (Metric)=0603, Dielectric=X7S, Max Operating Temperature=125°C, Min Operating Temperature=-55°C, Package Quantity=15000, Tolerance=10%, Voltage Rating=16V, Case/Package=0201, Height=0.3mm, Length=0.024inch, Mount="Surface Mount", Packaging="Tape and Reel", Termination=SMD/SMT, Thickness=0.013inch, Voltage Rating (DC)=16V, Weight=1.2E-05oz, Width=0.3mm
C14: library part CMP-13271-000008-1, "CAP CER 1UF 16V X5R 0201", Manufacturer="Samsung Electro-Mechanics", Manufacturer Part Number=CL03A105MO3NRNH, Package=CL03, Temperature="-55°C to +85°C", Temperature Characteristic=X5R, Temperature Coefficient=15%, Temperature Range High=+85°C, Temperature Range Low=-55°C, Tolerance=20%, Voltage Rating=16V, Automotive=No, Capacitance=1uF, Category=Cap, ComponentLink2Description=Datasheet, ComponentLink2URL=http://www.samsungsem.com/global/front/downloadcms.do?path=%2F%2Fglobal%2F%2Fsupport%2F%2Fproduct-search%2F%2Fmlcc%2F%2F__icsFiles%2F%2Fafieldfile%2F%2F2018%2F%2F06%2F%2F21&fileName=CL03A105MO3NRNH.pdf, Device Class L1="Passive Components", Device Class L2=Capacitors, Device Class L3="Ceramic Capacitors", Digikey Description="CAP CER 1UF 16V X5R 0201", Height=0.39mm, Ipc Land Pattern Name=CAPC6030X30, Lead Free=Yes, Material=Ceramic, Octopart=https://octopart.com/cl03a105mo3nrnh-samsung-47681184, RoHS=TRUE
C16 C23: library part CMP-03422-000819-1, "CAP CER 4.7UF 16V X5R 0402", Capacitance="4.7 uF", Manufacturer=YAGEO, Manufacturer Part Number=CC0402MRX5R7BB475, Package=CC0402, Temperature="-55°C to +125°C", Temperature Characteristic=X5R, Temperature Coefficient=30ppm/°C, Temperature Range High=+125°C, Temperature Range Low=-55°C, Tolerance=0.2, Voltage Rating="16 V", Automotive=No, Automotive Grade=NA, Category=Cap, ComponentLink2Description=Datasheet, ComponentLink2URL=http://www.yageo.com/documents/recent/UPY-GP_NP0_16V-to-50V_16.pdf, Device Class L1="Passive Components", Device Class L2=Capacitors, Device Class L3="Ceramic Capacitors", Digikey Description="CAP CER 4.7UF 16V X5R 0402", Footprint Url=http://www.yageo.com/exep/pages/download/literatures/UPY-C_GEN_24.pdf, Height=0.55mm, Ipc Land Pattern Name=CAPC10050X50, Lead Free=Yes, Material=Ceramic, Mouser Description="Multilayer Ceramic Capacitors MLCC - SMD/SMT 4.7uF 16V 20% Ceramic Capacitor", Octopart=https://octopart.com/cc0402mrx5r7bb475-yageo-81932628, RoHS=TRUE
C18: library part CMP-06035-002798-1, "Chip Multilayer Ceramic Capacitors for General Purpose, 0201, 1.0uF, X5R, 15%, 20%, 10V", Case Code (Imperial)=0201, Case Code (Metric)=0603, Dielectric=X5R, Max Operating Temperature=85°C, Min Operating Temperature=-55°C, Tolerance=20%, Voltage Rating=10V, Capacitance=1uF, Case/Package=0201, Length=0.024inch, Mount="Surface Mount", Packaging="Tape and Reel", Thickness=0.015inch, Voltage Rating (DC)=10V, Width=0.012inch
D1: library part CMP-1431-00001-2, Case Code (Imperial)=1411, Case Code (Metric)=3528, Color="Green, Red", Forward Current=100mA, Forward Voltage=3.2V, Max Operating Temperature=85°C, Max Reverse Voltage (DC)=5V, Min Operating Temperature=-40°C, Power Dissipation=72mW, Test Current=20mA, Case/Package=1411, Dominant Wavelength=520nm, Height=1.9mm, Length=3.5mm, Lens Style="Clear, Round", Luminous Intensity=230mcd, Mount="Surface Mount", NexarPartId=29717795, Number of Pins=4, Packaging="Tape and Reel", Peak Wavelength=465nm, REACH SVHC=Unknown, RoHS=Compliant, Viewing Angle=120°, Wavelength=470nm, Width=2.8mm
D2: library part CMP-1426-00002-4, "430mcd Colorless transparence 520nm Emerald 140° LED0603 Light Emitting Diodes (LED) ROHS", Case Code (Imperial)=0603, Case Code (Metric)=1608, Color=Green, Forward Current=100mA, Forward Voltage=3.2V, Max Junction Temperature (Tj)=95°C, Max Operating Temperature=85°C, Max Reverse Voltage (DC)=5V, Min Operating Temperature=-40°C, Output Current=10µA, Power Dissipation=105mW, Test Current=20mA, Case/Package=0603, Dominant Wavelength=525nm, Height=700µm, Lead Free="Lead Free", Length=1.6mm, Lens Style="Clear, Rectangular", Luminous Intensity=430mcd, Mount="Surface Mount", Packaging="Tape and Reel", Peak Wavelength=515nm, REACH SVHC=Unknown, Reverse Voltage=5V, RoHS=Compliant, Viewing Angle=140°, Wavelength=525nm, Width=800µm
FB1: library part CMP-0686-00046-3, "Ferrite Bead, 0201, 120Ω @ 100MHz, 25%, 0.5Ω, 200mA", Case Code (Imperial)=0201, Case Code (Metric)=0603, Current Rating=200mA, DC Resistance (DCR)=500mR, Frequency=100MHz, Max Operating Temperature=125°C, Min Operating Temperature=-55°C, Package Quantity=1, Tolerance=25%, Case/Package=0201, Core Material=Ferrite, DC Resistance-Max=500mR, Depth=0.33mm, Height=0.3mm, Impedance=120R, Lead Free="Lead Free", Length=0.6mm, Material=Steel, Max Current Rating=200mA, Max DC Current=200mA, Number of Circuits=1, Number of Lines=1, Number of Pins=2, Packaging="Tape and Reel", REACH SVHC="No SVHC", RoHS Compliant=Yes, Series=BLM03AG, Shielding=Unshielded, Termination=SMD/SMT, Test Frequency=100MHz, Width=0.3mm
FB2: library part CMP-06046-002105-1, "BLM03EB500SH1D, Ferrite Bead, 0201, 50Ω @ 100MHz, 25%, 0.58Ω, 400mA", RoHS Compliant=Yes
FL1: library part CMP-12075-000002-1, "COMMON MODE CHOKE 2LN SMD ESD", Case/Package=QFN, DC Resistance (DCR)=4R, Max Operating Temperature=85°C, Min Operating Temperature=-30°C, Package Quantity=3000, Depth=1.25mm, Height=0.022inch, Lead Free="Lead Free", Length=0.098inch, Mount="Surface Mount", Number of Lines=2, Number of Pins=8, Packaging="Tape and Reel", REACH SVHC="No SVHC", Termination=Flat, Width=0.047inch
J1: library part CMP-245163-000001-1, "CONN RCPT USB2.0 TYPEC 5A", Current Rating=5/6.25/1.25/0.25A, Manufacturer=GCT, Package=0, Temperature="-40°C to +85°C", Temperature Range High=+85°C, Temperature Range Low=-40°C, Voltage Rating=20V, Automotive=No, Category=Conn, ComponentLink2Description=Datasheet, ComponentLink2URL=https://gct.co/files/drawings/usb4105.pdf, Conn Orientation="Right Angle", Contact Material=Gold,Nickel, Device Class L1=Connectors, Device Class L2="USB Connectors", Device Class L3=unset, Digikey Description="CONN RCPT USB2.0 TYPEC 5A", Height=3.46mm, Is Female=yes, Lead Free=Yes, Manufacturer Part Number=USB4105-GF-A, Number of Contacts=16, Octopart=https://octopart.com/usb4105-gf-a-gct-106627878, RoHS=TRUE, USB Standard="USB 2.0"
L1: library part CMP-08253-000311-1, "Shielded Multilayer Inductor 4.7uH ±20% 350mA 650mΩ SMD 0603", Case Code (Imperial)=0603, Case Code (Metric)=1608, Current Rating=350mA, DC Resistance (DCR)=650mR, Max Operating Temperature=125°C, Min Operating Temperature=-55°C, Package Quantity=4000, Saturation Current=120mA, Self Resonant Frequency=80MHz, Test Frequency=2MHz, Tolerance=20%, Case/Package=0603, Core Material=Ferrite, Height - Seated (Max)=0.037inch, Inductance=4.7uH, Length=0.063inch, Mount="Surface Mount", Packaging="Tape and Reel", RoHS Compliant=Yes, Shielding=Shielded, Width=0.031inch
L2: library part CMP-06042-004733-1, "Film type RF Inductor 2.7nH ±0.1nH 600mA 0.12Ω 0201 (0603)", Case Code (Imperial)=0201, Case Code (Metric)=0603, Current Rating=600mA, DC Resistance (DCR)=120mR, Max Operating Temperature=125°C, Min Operating Temperature=-55°C, Resistor Type="Thin Film", Self Resonant Frequency=9GHz, Test Frequency=500MHz, Case/Package=0201, Core Material=Non-Magnetic, Inductance=2.7nH, Mount="Surface Mount", Packaging="Tape and Reel", Shielding=Unshielded
L3 L4: library part CMP-06042-011870-1, "Film type RF Inductor 3.5nH ±0.1nH 450mA 0.25Ω 0201 (0603)", Case Code (Imperial)=0201, Case Code (Metric)=0603, Current Rating=450mA, DC Resistance (DCR)=250mR, Max Operating Temperature=125°C, Min Operating Temperature=-55°C, Package Quantity=15000, Resistor Type="Thin Film", Self Resonant Frequency=7GHz, Test Frequency=500MHz, Case/Package=0201, Core Material=Non-Magnetic, Height=0.3mm, Height - Seated (Max)=0.013inch, Inductance=3.5nH, Lead Free="Lead Free", Length=0.024inch, Max DC Current=450mA, Mount="Surface Mount", Packaging="Tape and Reel", Q Factor=14, Shielding=Unshielded, Termination=SMD/SMT, Width=0.012inch
L5: library part CMP-06042-009962-1, "Shielded Wirewound Inductor 2.2uH 20% 1800mA 0.116Ω 0806 (2016)"
P1: library part CMP-1502-00948-3, Color=Black, Contact Resistance=20mΩ, Current Rating=1A, Max Operating Temperature=105°C, Min Operating Temperature=-40°C, Operating Supply Voltage=100V, Connector Type="Male Pin", Contact Material=Copper, Contact Mating Length=3.81mm, Contact Plating=Gold, Gender=Male, Height=5.65mm, Lead Pitch=1.27mm, Mount="Through Hole", NexarPartId=32855586, Number of Contacts=10, Number of Pins=10, Number of Positions=10, Number of Rows=2, Orientation=Vertical, Packaging=Box, Pitch=1.27mm, REACH SVHC=Unknown, RoHS=Compliant, Row Spacing=1.27mm, Termination=Solder, Voltage Rating=100V
P2 P3: library part Male_Headers_254_1x10
R1 R5 R6 R8: library part CMP-2004-00209-1, Manufacturer="Vishay Dale", Part Number=CRCW02011K00FNED
R2: library part CMP-1011-00001-2, Manufacturer="Yageo / Phycomp", Part Number=RC0402JR-070RL
R3 R4: library part CMP-2004-02525-1, Manufacturer=Multicomp, Part Number=MCRE000157
R7: library part CMP-2002-00823-1, Manufacturer=Panasonic, Part Number=ERJ-2RKF2673X
R9 R11 R12: library part CMP-1011-00018-1, "4R7 0.063W 5% 0402 (1005 Metric)  SMD", Case-EIA=0402, Case-Metric=1005, Power="0.063 W", Tolerance="5 %", Technology=SMT
R10: library part CMP-2002-00152-1, Manufacturer="Vishay Dale", Part Number=CRCW040262R0JNED
SW1: library part CMP-03913-134708202-2, "Tactile Switch, 0.05A, 32VDC, SMD, 400GF Rohs Compliant: Yes", Current Rating=50mA, Insulation Resistance=1GΩ, Max Operating Temperature=125°C, Min Operating Temperature=-55°C, Voltage Rating=32V, Contact Plating=Silver, Packaging="Tape and Reel", RoHS=Compliant
U1: library part nRF54L15_QFN8_6X6, "Ultra-low-power wireless SoC"
U2: library part CMP-04918-000086-1, "ULTRA LOW IQ BUCK CONVERTER", Manufacturer="Texas Instruments", Max Junction Temp=+125°C, Max Supply Voltage=6.5V, Min Supply Voltage=1.8V, Nominal Supply Current=0.005-3000uA, Output Current=750mA, Output Voltage=1.8-3.3V, Package=DLC0008B, Switching Frequency=1.8MHz, Temperature="-40°C to +125°C", Temperature Range Low=-40°C, Automotive=No, Category=IC, ComponentLink2Description=Datasheet, ComponentLink2URL=http://www.ti.com/lit/ds/symlink/tps62840.pdf, Device Class L1="Integrated Circuits (ICs)", Device Class L2="Power Management ICs", Device Class L3="Voltage Regulators - Switching", Digikey Description="ULTRA LOW IQ BUCK CONVERTER", Height=1mm, Ipc Land Pattern Name=DFN200X150X100-8, Lead Free=Yes, Manufacturer Part Number=TPS62840DLCR, Max Duty Cycle=100%, Mouser Description="60-nA IQ, 1.8-V to 6.5-VIN, high-efficiency 750-mA step-down converter 8-VSON-HR -40 to 125", Number Of Outputs=1, Octopart=https://octopart.com/tps62840dlcr-texas+instruments-103121111, Output Type=AdjustableProgrammable, RoHS=TRUE, Standoff Height=0mm, Switching Topology=Buck, Temperature Range High=+125°C